# EAGLE board led-er-v3-module (copying) (EAGLE 7.5.0)
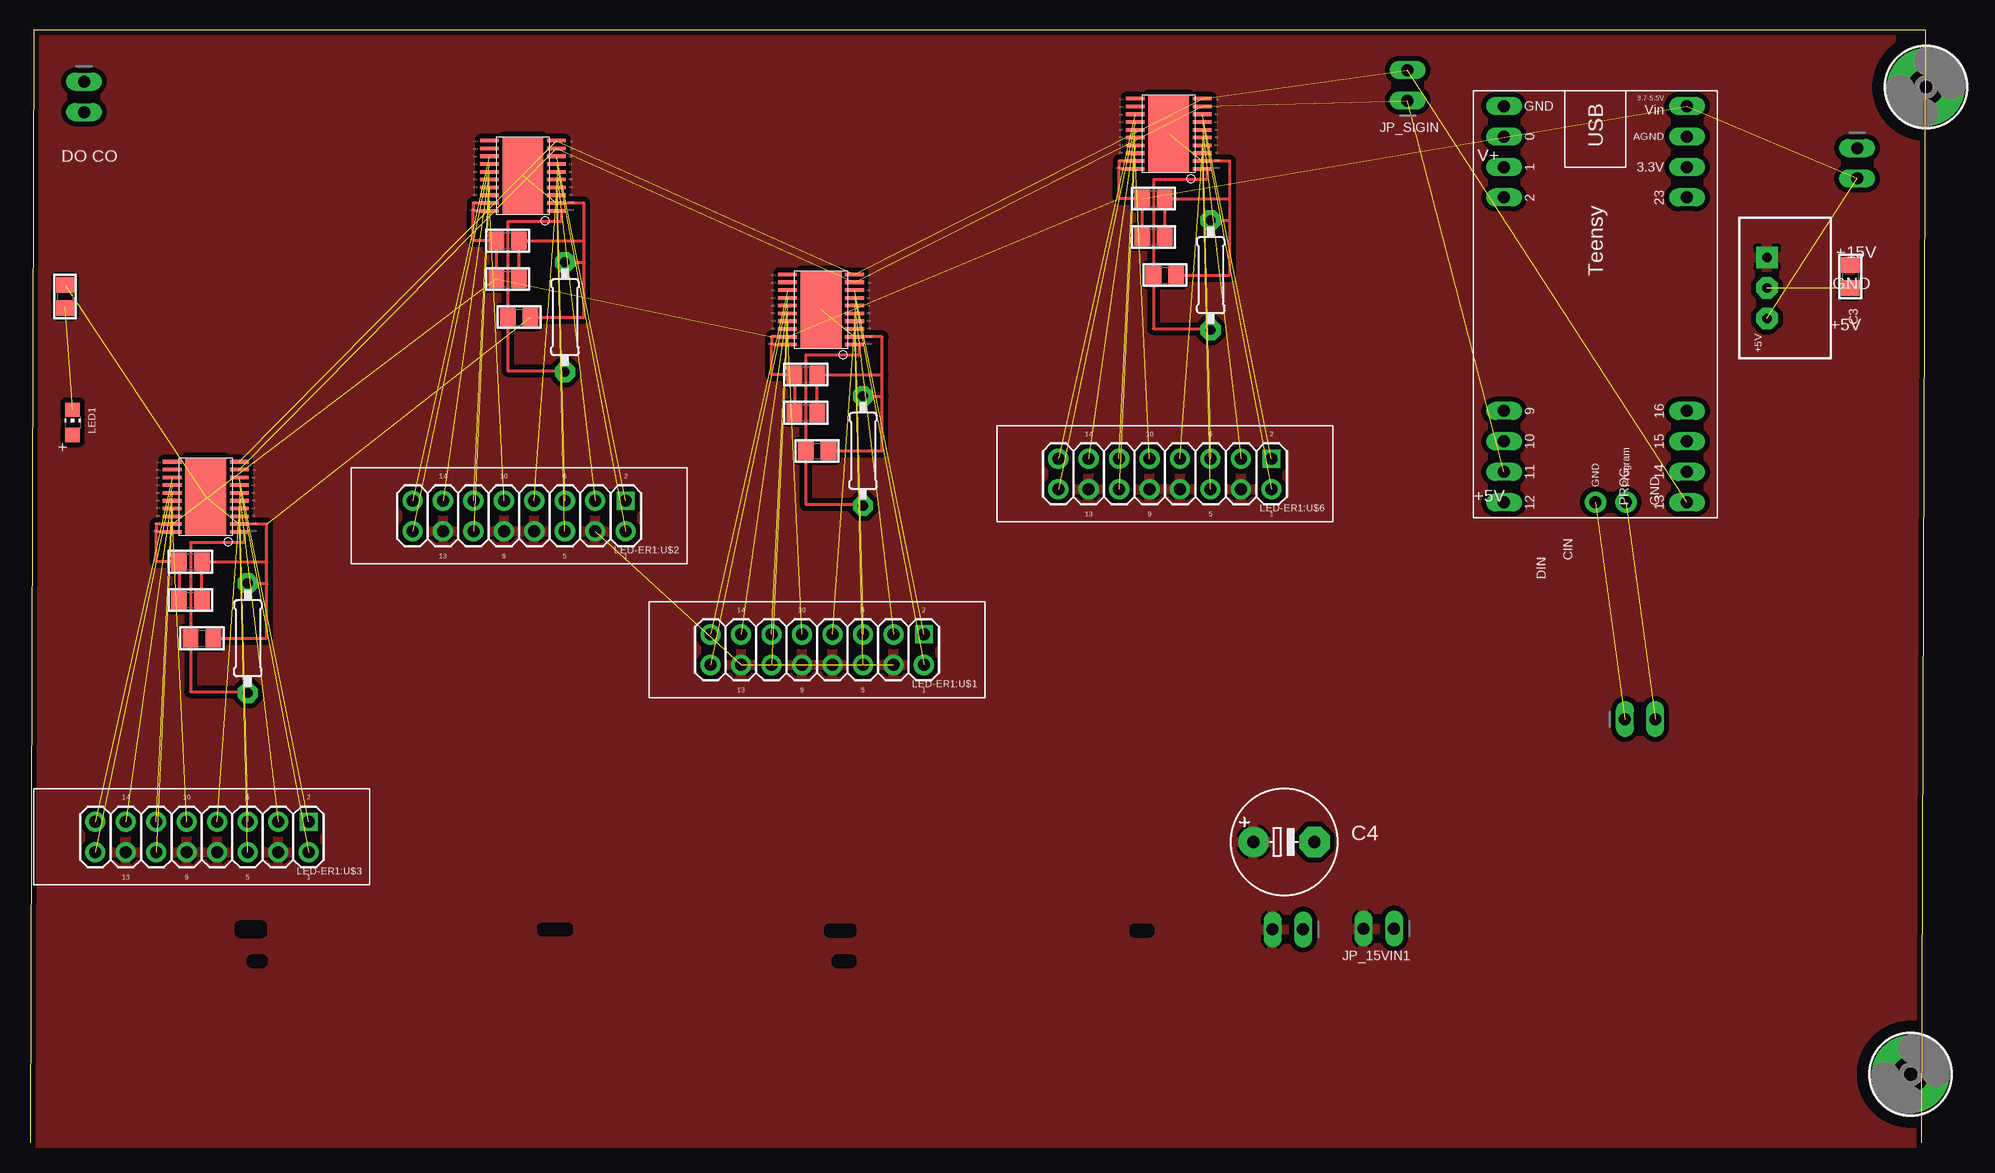
[diagram p0: board, top side]
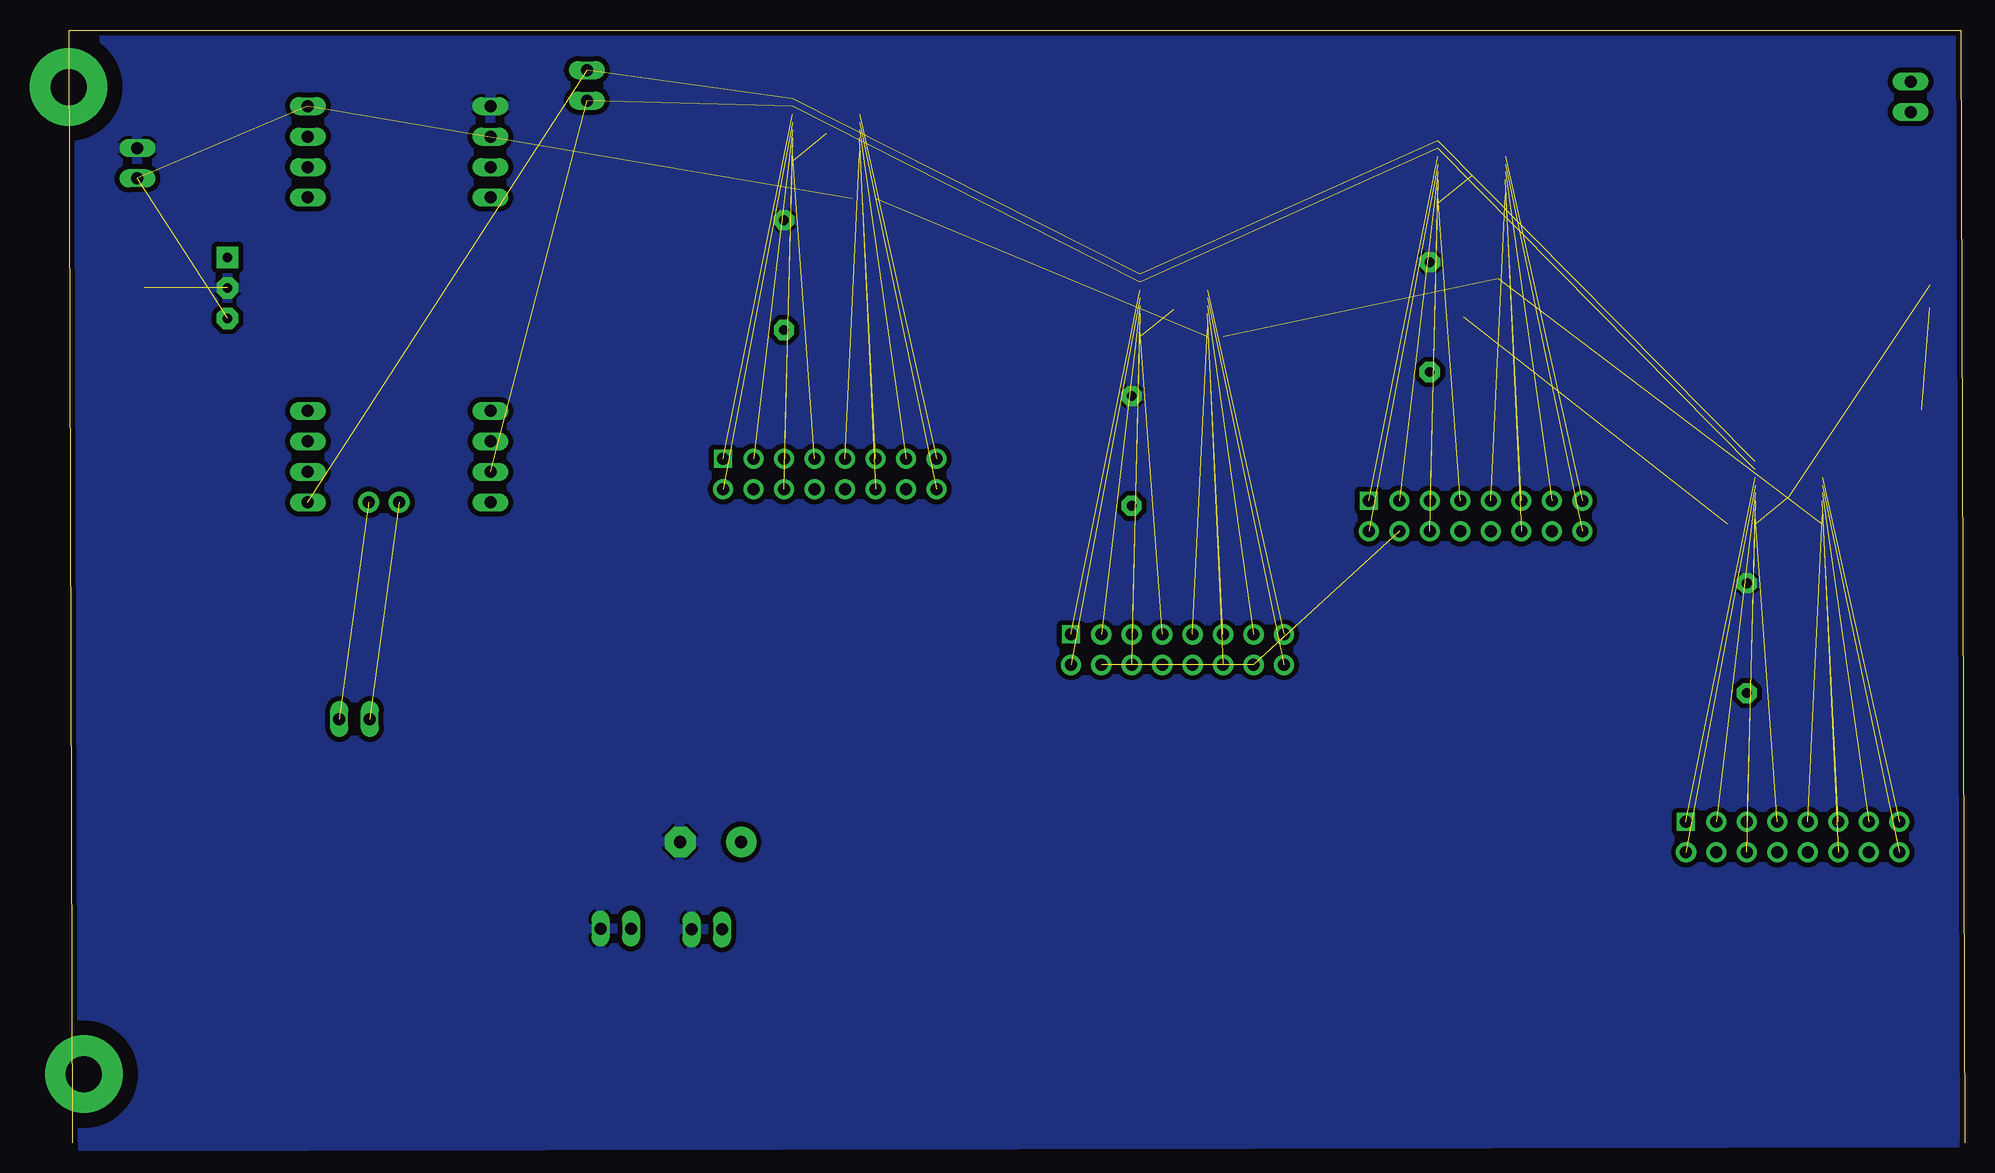
[diagram p1: board, bottom side, seen from below]

Size 158.01 x 92.73 mm. Coordinates in mm from the lower left corner, seen from the top.
Outline: 157.69,0 158,92.73 0.32,92.73 0,0
Copper layers (1*16): Top 0.0356mm / dielectric 1.5011mm / Bottom 0.0356mm
Design rules "LaenPCBOrder": minimum track width 6mil, minimum drill 13mil, track to track 6mil, track to pad 6mil, pad to pad 6mil, via to via 6mil, smd to smd 6mil, copper to edge 15mil, drill to drill 6mil, minimum pad ring 7mil, minimum via ring 7mil, stop-mask expansion 3mil, vias tented up to drill 0mil, thermal gap 10mil
tRestrict: area 17.5,17.5 to 19.4,18.1; area 18.5,15 to 19.4,15.3; area 42.6,17.6 to 44.9,17.9; area 66.6,17.5 to 68.5,17.8; area 67.2,15 to 68.5,15.3; area 92.1,17.5 to 93.3,17.8

## Footprints (pad centres in the part's own frame; a part is rotated, then mirrored left to right if it is on the bottom)
0805 = smd 1.3 x 1.5: 1 -0.95,0; 2 0.95,0
E5-8,5 = drill 1.016 pad 2.54: + -2.54,0 | drill 1.016 pad 2.54 octagon: - 2.54,0
1X02_OVAL = drill 1 long: 1 -1.27,0; 2 1.27,0
CHIP-LED0805 = smd 1.2 x 1.2: A 0,-1.05; C 0,1.05
0207/9 = drill 0.813 pad 1.676 octagon: 1 -4.572,0; 2 4.572,0
HTSSOP20DAP = smd 0.3 x 1.55: 1 -2.925,-2.8; 2 -2.275,-2.8; 3 -1.625,-2.8; 4 -0.975,-2.8; 5 -0.325,-2.8; 6 0.325,-2.8; 7 0.975,-2.8; 8 1.625,-2.8; 9 2.275,-2.8; 10 2.925,-2.8; 11 2.925,2.8; 12 2.275,2.8; 13 1.625,2.8; 14 0.975,2.8; 15 0.325,2.8; 16 -0.325,2.8; 17 -0.975,2.8; 18 -1.625,2.8; 19 -2.275,2.8; 20 -2.925,2.8 | smd 6.5 x 3.4: EXP 0,0
2X08_RIBBON = drill 1 pad 1.676: P1 -8.89,1.27; P3 -6.35,1.27; P4 -6.35,-1.27; P5 -3.81,1.27; P6 -3.81,-1.27; P7 -1.27,1.27; P8 -1.27,-1.27; P9 1.27,1.27; P10 1.27,-1.27; P11 3.81,1.27; P12 3.81,-1.27; P13 6.35,1.27; P14 6.35,-1.27; P15 8.89,1.27; P16 8.89,-1.27 | drill 1 square: P2 -8.89,-1.27
TSR-1 = drill 0.8 pad 1.8 square: 1 -2.54,-1.5 | drill 0.8 pad 1.8 octagon: 2 0,-1.5; 3 2.54,-1.5
MOUNTINGHOLE_3.0_PLATED = drill 3 pad 6.452: P$1 0,0
TEENSY_LEDER = drill 1 pad 1.422 long: 0 12.7,7.62; 1 10.16,7.62; 2 7.62,7.62; 3.3V 10.16,-7.62; 9 -10.16,7.62; 10 -12.7,7.62; 11 -15.24,7.62; 12 -17.78,7.62; 13 -17.78,-7.62; 14 -15.24,-7.62; 15 -12.7,-7.62; 16 -10.16,-7.62; 23 7.62,-7.62; AGND 12.7,-7.62; GND 15.24,7.62; VIN 15.24,-7.62 | drill 1 pad 1.778: GND2 -17.78,0; PROG -17.78,-2.54

## Placement (x,y rotation side)
C3  10uF/16V  [0805]  151.73,72.2 270 top
C4  220uF+  [E5-8,5]  104.53,25.07 0 top
JP_5V  [1X02_OVAL]  152.31,81.63 270 top
JP_15VIN  [1X02_OVAL]  104.85,17.78 180 top
JP_15VIN1  [1X02_OVAL]  112.44,17.84 180 top
JP_PROG  [1X02_OVAL]  134.21,35.29 0 top
JP_SIGIN  [1X02_OVAL]  114.83,88.12 90 top
JP_SIGOUT  [1X02_OVAL]  4.5,87.15 270 top
LED1  Green  [CHIP-LED0805]  3.56,60.03 0 top
LED-ER1:C1  1uF/50V  [0805]  64.66,64.02 0 top
LED-ER1:C2  10uF 25V  [0805]  64.66,60.84 0 top
LED-ER1:C3  1uF/50V  [0805]  39.81,75.17 0 top
LED-ER1:C4  10uF 25V  [0805]  39.81,71.98 0 top
LED-ER1:C5  1uF/50V  [0805]  93.64,78.67 0 top
LED-ER1:C6  1uF/50V  [0805]  13.38,48.41 0 top
LED-ER1:C7  10uF 25V  [0805]  13.38,45.23 0 top
LED-ER1:C11  10uF 25V  [0805]  93.64,75.49 0 top
LED-ER1:R1  22K  [0805]  65.61,57.65 0 top
LED-ER1:R2  [0207/9]  69.44,57.65 90 top
LED-ER1:R3  22K  [0805]  94.6,72.3 0 top
LED-ER1:R4  22K  [0805]  40.77,68.8 0 top
LED-ER1:R5  [0207/9]  44.59,68.8 90 top
LED-ER1:R6  [0207/9]  98.42,72.3 90 top
LED-ER1:R7  22K  [0805]  14.33,42.04 0 top
LED-ER1:R8  [0207/9]  18.16,42.04 90 top
LED-ER1:TLC1  TLC59711  [HTSSOP20DAP]  94.92,84.09 90 top
LED-ER1:TLC2  TLC59711  [HTSSOP20DAP]  65.93,69.44 90 top
LED-ER1:TLC3  TLC59711  [HTSSOP20DAP]  41.09,80.58 90 top
LED-ER1:TLC4  TLC59711  [HTSSOP20DAP]  14.65,53.83 90 top
LED-ER1:U$1  HEADER-2X8-RIBBON  [2X08_RIBBON]  65.61,41.09 180 top
LED-ER1:U$2  HEADER-2X8-RIBBON  [2X08_RIBBON]  40.77,52.24 180 top
LED-ER1:U$3  HEADER-2X8-RIBBON  [2X08_RIBBON]  14.33,25.48 180 top
LED-ER1:U$6  HEADER-2X8-RIBBON  [2X08_RIBBON]  94.6,55.74 180 top
R2  470  [0805]  2.92,70.53 270 top
TSR1-2450  TSR1-2450  [TSR-1]  146.29,71.24 270 top
U$1  MOUNTINGHOLE  [MOUNTINGHOLE_3.0_PLATED]  158.03,87.98 0 top
U$3  MOUNTINGHOLE  [MOUNTINGHOLE_3.0_PLATED]  156.76,5.72 0 top
U$5  TEENSY_LEDER  [TEENSY_LEDER]  130.49,71.15 90 top

## Library data of the parts
C3 JP_5V JP_15VIN JP_15VIN1 JP_PROG JP_SIGIN JP_SIGOUT LED-ER1:C1-LED-ER1:C7 LED-ER1:C11 LED-ER1:R1 LED-ER1:R3 LED-ER1:R4 LED-ER1:R7 R2 U$1 U$3 = microbuilder
C4 LED1 LED-ER1:R2 LED-ER1:R5 LED-ER1:R6 LED-ER1:R8 LED-ER1:TLC1-LED-ER1:TLC4 = adafruit
LED-ER1:U$1-LED-ER1:U$3 LED-ER1:U$6 U$5 = Andrews
TSR1-2450 = SteelCaveRobotics-Power

## Nets
1SCKI: JP_SIGIN.2 LED-ER1:TLC1.10 LED-ER1:TLC2.10 LED-ER1:TLC3.10 LED-ER1:TLC4.10 U$5.13
1SDTI: JP_SIGIN.1 LED-ER1:TLC1.9 LED-ER1:TLC2.9 LED-ER1:TLC3.9 LED-ER1:TLC4.9 U$5.11
+5V: JP_5V.2 LED-ER1:C1.1 LED-ER1:C2.1 LED-ER1:C3.1 LED-ER1:C4.1 LED-ER1:C5.1 LED-ER1:C6.1 LED-ER1:C7.1 LED-ER1:C11.1 LED-ER1:TLC1.19 LED-ER1:TLC1.20 LED-ER1:TLC2.19 LED-ER1:TLC2.20 LED-ER1:TLC3.19 LED-ER1:TLC3.20 LED-ER1:TLC4.19 LED-ER1:TLC4.20 TSR1-2450.3 U$5.VIN
+15V: C3.1 C4.+ JP_15VIN1.2 JP_15VIN.2 LED-ER1:U$1.P3 LED-ER1:U$1.P7 LED-ER1:U$1.P9 LED-ER1:U$1.P13 LED-ER1:U$2.P3 LED-ER1:U$2.P7 LED-ER1:U$2.P9 LED-ER1:U$2.P13 LED-ER1:U$3.P3 LED-ER1:U$3.P7 LED-ER1:U$3.P9 LED-ER1:U$3.P13 LED-ER1:U$6.P3 LED-ER1:U$6.P7 LED-ER1:U$6.P9 LED-ER1:U$6.P13 TSR1-2450.1
GND: C3.2 C4.- JP_5V.1 JP_15VIN1.1 JP_15VIN.1 LED-ER1:C1.2 LED-ER1:C2.2 LED-ER1:C3.2 LED-ER1:C4.2 LED-ER1:C5.2 LED-ER1:C6.2 LED-ER1:C7.2 LED-ER1:C11.2 LED-ER1:R1.2 LED-ER1:R2.2 LED-ER1:R3.2 LED-ER1:R4.2 LED-ER1:R5.2 LED-ER1:R6.2 LED-ER1:R7.2 LED-ER1:R8.2 LED-ER1:TLC1.2 LED-ER1:TLC1.EXP LED-ER1:TLC2.2 LED-ER1:TLC2.EXP LED-ER1:TLC3.2 LED-ER1:TLC3.EXP LED-ER1:TLC4.2 LED-ER1:TLC4.EXP R2.1 TSR1-2450.2 U$5.GND
LED-ER1:2SCKO: LED-ER1:TLC1.11
LED-ER1:2SCKO1: LED-ER1:TLC2.11
LED-ER1:2SCKO2: LED-ER1:TLC3.11
LED-ER1:2SCKO3: LED-ER1:TLC4.11
LED-ER1:2SDTO: LED-ER1:TLC1.12
LED-ER1:2SDTO1: LED-ER1:TLC2.12
LED-ER1:2SDTO2: LED-ER1:TLC3.12
LED-ER1:2SDTO3: LED-ER1:TLC4.12
LED-ER1:B0: LED-ER1:TLC1.5 LED-ER1:U$6.P6
LED-ER1:B1: LED-ER1:TLC1.8 LED-ER1:U$6.P2
LED-ER1:B2: LED-ER1:TLC1.15 LED-ER1:U$6.P14
LED-ER1:B3: LED-ER1:TLC1.18 LED-ER1:U$6.P10
LED-ER1:B4: LED-ER1:TLC2.8 LED-ER1:U$1.P2
LED-ER1:B5: LED-ER1:TLC2.5 LED-ER1:U$1.P6
LED-ER1:B6: LED-ER1:TLC2.15 LED-ER1:U$1.P14
LED-ER1:B7: LED-ER1:TLC2.18 LED-ER1:U$1.P10
LED-ER1:B8: LED-ER1:TLC3.8 LED-ER1:U$2.P2
LED-ER1:B9: LED-ER1:TLC3.5 LED-ER1:U$2.P6
LED-ER1:B10: LED-ER1:TLC3.15 LED-ER1:U$2.P14
LED-ER1:B11: LED-ER1:TLC3.18 LED-ER1:U$2.P10
LED-ER1:B12: LED-ER1:TLC4.8 LED-ER1:U$3.P2
LED-ER1:B13: LED-ER1:TLC4.5 LED-ER1:U$3.P6
LED-ER1:B14: LED-ER1:TLC4.15 LED-ER1:U$3.P14
LED-ER1:B15: LED-ER1:TLC4.18 LED-ER1:U$3.P10
LED-ER1:G0: LED-ER1:TLC1.4 LED-ER1:U$6.P5
LED-ER1:G1: LED-ER1:TLC1.7 LED-ER1:U$6.P1
LED-ER1:G2: LED-ER1:TLC1.14 LED-ER1:U$6.P15
LED-ER1:G3: LED-ER1:TLC1.17 LED-ER1:U$6.P11
LED-ER1:G4: LED-ER1:TLC2.7 LED-ER1:U$1.P1
LED-ER1:G5: LED-ER1:TLC2.4 LED-ER1:U$1.P5
LED-ER1:G6: LED-ER1:TLC2.17 LED-ER1:U$1.P11
LED-ER1:G7: LED-ER1:TLC2.14 LED-ER1:U$1.P15
LED-ER1:G8: LED-ER1:TLC3.7 LED-ER1:U$2.P1
LED-ER1:G9: LED-ER1:TLC3.4 LED-ER1:U$2.P5
LED-ER1:G10: LED-ER1:TLC3.17 LED-ER1:U$2.P11
LED-ER1:G11: LED-ER1:TLC3.14 LED-ER1:U$2.P15
LED-ER1:G12: LED-ER1:TLC4.7 LED-ER1:U$3.P1
LED-ER1:G13: LED-ER1:TLC4.4 LED-ER1:U$3.P5
LED-ER1:G14: LED-ER1:TLC4.17 LED-ER1:U$3.P11
LED-ER1:G15: LED-ER1:TLC4.14 LED-ER1:U$3.P15
LED-ER1:IREF: LED-ER1:R3.1 LED-ER1:R6.1 LED-ER1:TLC1.1
LED-ER1:IREF1: LED-ER1:R1.1 LED-ER1:R2.1 LED-ER1:TLC2.1
LED-ER1:IREF2: LED-ER1:R4.1 LED-ER1:R5.1 LED-ER1:TLC3.1
LED-ER1:IREF3: LED-ER1:R7.1 LED-ER1:R8.1 LED-ER1:TLC4.1
LED-ER1:R0: LED-ER1:TLC1.3 LED-ER1:U$6.P8
LED-ER1:R1: LED-ER1:TLC1.6 LED-ER1:U$6.P4
LED-ER1:R2: LED-ER1:TLC1.13 LED-ER1:U$6.P16
LED-ER1:R3: LED-ER1:TLC1.16 LED-ER1:U$6.P12
LED-ER1:R4: LED-ER1:TLC2.6 LED-ER1:U$1.P4
LED-ER1:R5: LED-ER1:TLC2.3 LED-ER1:U$1.P8
LED-ER1:R6: LED-ER1:TLC2.16 LED-ER1:U$1.P12
LED-ER1:R7: LED-ER1:TLC2.13 LED-ER1:U$1.P16
LED-ER1:R8: LED-ER1:TLC3.6 LED-ER1:U$2.P4
LED-ER1:R9: LED-ER1:TLC3.3 LED-ER1:U$2.P8
LED-ER1:R10: LED-ER1:TLC3.16 LED-ER1:U$2.P12
LED-ER1:R11: LED-ER1:TLC3.13 LED-ER1:U$2.P16
LED-ER1:R12: LED-ER1:TLC4.6 LED-ER1:U$3.P4
LED-ER1:R13: LED-ER1:TLC4.3 LED-ER1:U$3.P8
LED-ER1:R14: LED-ER1:TLC4.16 LED-ER1:U$3.P12
LED-ER1:R15: LED-ER1:TLC4.13 LED-ER1:U$3.P16
N$1: LED1.C R2.2
N$54: JP_PROG.1 U$5.GND2
N$55: JP_PROG.2 U$5.PROG
VCC: LED1.A

## Tracks (layer width: path | path; a pad name or v marks a point on that pad's centre or on a via)
1SCKI  (5 unrouted)
1SDTI  (5 unrouted)
+5V  (6 unrouted)
  Top 0.254: LED-ER1:TLC1.19 90.78,81.81 90.78,81.22 90.78,81.16 | 90.78,81.16 LED-ER1:TLC1.20 | 90.78,81.16 90.78,78.67 LED-ER1:C5.1 92.69,77.72 LED-ER1:C11.1 | LED-ER1:TLC2.19 61.79,67.16 61.79,66.57 61.8,66.57 61.8,66.51 | 61.8,66.51 LED-ER1:TLC2.20 | 61.8,66.51 61.8,64.02 LED-ER1:C1.1 63.71,63.07 LED-ER1:C2.1 | LED-ER1:TLC3.19 36.95,78.31 36.95,77.72 36.95,77.66 | 36.95,77.66 LED-ER1:TLC3.20 | 36.95,77.66 36.95,75.17 LED-ER1:C3.1 38.86,74.21 LED-ER1:C4.1 | LED-ER1:TLC4.19 10.51,51.55 10.51,50.96 10.51,50.9 | 10.51,50.9 LED-ER1:TLC4.20 | 10.51,50.9 10.51,48.41 LED-ER1:C6.1 12.43,47.46 LED-ER1:C7.1
+15V  (4 unrouted)
  pour Top (isolate 0.406, rank 2): 0.32,92.74 0,0 157.38,0 157.7,92.74
GND  (7 unrouted)
  Top 0.254: 100.01,78.67 LED-ER1:C5.2 LED-ER1:C11.2 | 100.01,78.67 100.01,81.81 LED-ER1:TLC1.2 | LED-ER1:C11.2 | LED-ER1:R3.2 100.01,72.3 100.01,76.88 | 100.01,76.88 100.01,78.67 | LED-ER1:R6.2 100.01,76.88 | 71.02,64.02 LED-ER1:C1.2 LED-ER1:C2.2 | 71.02,64.02 71.02,67.16 LED-ER1:TLC2.2 | LED-ER1:C2.2 | LED-ER1:R1.2 71.02,57.65 71.02,62.11 71.02,62.22 | 71.02,62.22 71.02,64.02 | LED-ER1:R2.2 71.02,62.22 | 46.18,75.17 LED-ER1:C3.2 LED-ER1:C4.2 | 46.18,75.17 46.18,78.31 LED-ER1:TLC3.2 | LED-ER1:C4.2 | LED-ER1:R4.2 46.18,68.8 46.18,73.26 46.18,73.37 | 46.18,73.37 46.18,75.17 | LED-ER1:R5.2 46.18,73.37 | 19.74,48.41 LED-ER1:C6.2 LED-ER1:C7.2 | 19.74,48.41 19.74,51.55 LED-ER1:TLC4.2 | LED-ER1:C7.2 | LED-ER1:R7.2 19.74,42.04 19.74,46.5 19.74,46.62 | 19.74,46.62 19.74,48.41 | LED-ER1:R8.2 19.74,46.62
  pour Bottom (isolate 0.406, rank 2): 0,93.06 0,0 157.7,-0.32 157.7,92.74
LED-ER1:B0  (1 unrouted)
LED-ER1:B1  (1 unrouted)
LED-ER1:B2  (1 unrouted)
LED-ER1:B3  (1 unrouted)
LED-ER1:B4  (1 unrouted)
LED-ER1:B5  (1 unrouted)
LED-ER1:B6  (1 unrouted)
LED-ER1:B7  (1 unrouted)
LED-ER1:B8  (1 unrouted)
LED-ER1:B9  (1 unrouted)
LED-ER1:B10  (1 unrouted)
LED-ER1:B11  (1 unrouted)
LED-ER1:B12  (1 unrouted)
LED-ER1:B13  (1 unrouted)
LED-ER1:B14  (1 unrouted)
LED-ER1:B15  (1 unrouted)
LED-ER1:G0  (1 unrouted)
LED-ER1:G1  (1 unrouted)
LED-ER1:G2  (1 unrouted)
LED-ER1:G3  (1 unrouted)
LED-ER1:G4  (1 unrouted)
LED-ER1:G5  (1 unrouted)
LED-ER1:G6  (1 unrouted)
LED-ER1:G7  (1 unrouted)
LED-ER1:G8  (1 unrouted)
LED-ER1:G9  (1 unrouted)
LED-ER1:G10  (1 unrouted)
LED-ER1:G11  (1 unrouted)
LED-ER1:G12  (1 unrouted)
LED-ER1:G13  (1 unrouted)
LED-ER1:G14  (1 unrouted)
LED-ER1:G15  (1 unrouted)
LED-ER1:IREF
  Top 0.254: LED-ER1:TLC1.1 98.1,81.16 98.1,80.27 93.65,80.27 LED-ER1:R3.1 93.64,67.84 98.42,67.84 LED-ER1:R6.1
LED-ER1:IREF1
  Top 0.254: LED-ER1:TLC2.1 69.12,66.51 69.12,65.61 64.66,65.61 LED-ER1:R1.1 64.66,53.19 69.44,53.19 LED-ER1:R2.1
LED-ER1:IREF2
  Top 0.254: LED-ER1:TLC3.1 44.27,77.66 44.27,76.76 39.82,76.76 LED-ER1:R4.1 39.81,64.34 44.59,64.34 LED-ER1:R5.1
LED-ER1:IREF3
  Top 0.254: LED-ER1:TLC4.1 17.84,50.9 17.84,50.01 13.38,50.01 LED-ER1:R7.1 13.38,37.59 18.16,37.59 LED-ER1:R8.1
LED-ER1:R0  (1 unrouted)
LED-ER1:R1  (1 unrouted)
LED-ER1:R2  (1 unrouted)
LED-ER1:R3  (1 unrouted)
LED-ER1:R4  (1 unrouted)
LED-ER1:R5  (1 unrouted)
LED-ER1:R6  (1 unrouted)
LED-ER1:R7  (1 unrouted)
LED-ER1:R8  (1 unrouted)
LED-ER1:R9  (1 unrouted)
LED-ER1:R10  (1 unrouted)
LED-ER1:R11  (1 unrouted)
LED-ER1:R12  (1 unrouted)
LED-ER1:R13  (1 unrouted)
LED-ER1:R14  (1 unrouted)
LED-ER1:R15  (1 unrouted)
N$1  (1 unrouted)
N$54  (1 unrouted)
N$55  (1 unrouted)

## Text on the board
tPlace: DO | CO | V+ | +15V | GND | +5V | +5V | PROG | GND | CIN | DIN